# EAGLE board data-boardv6 (EAGLE 6.6.0), part 1 of 2
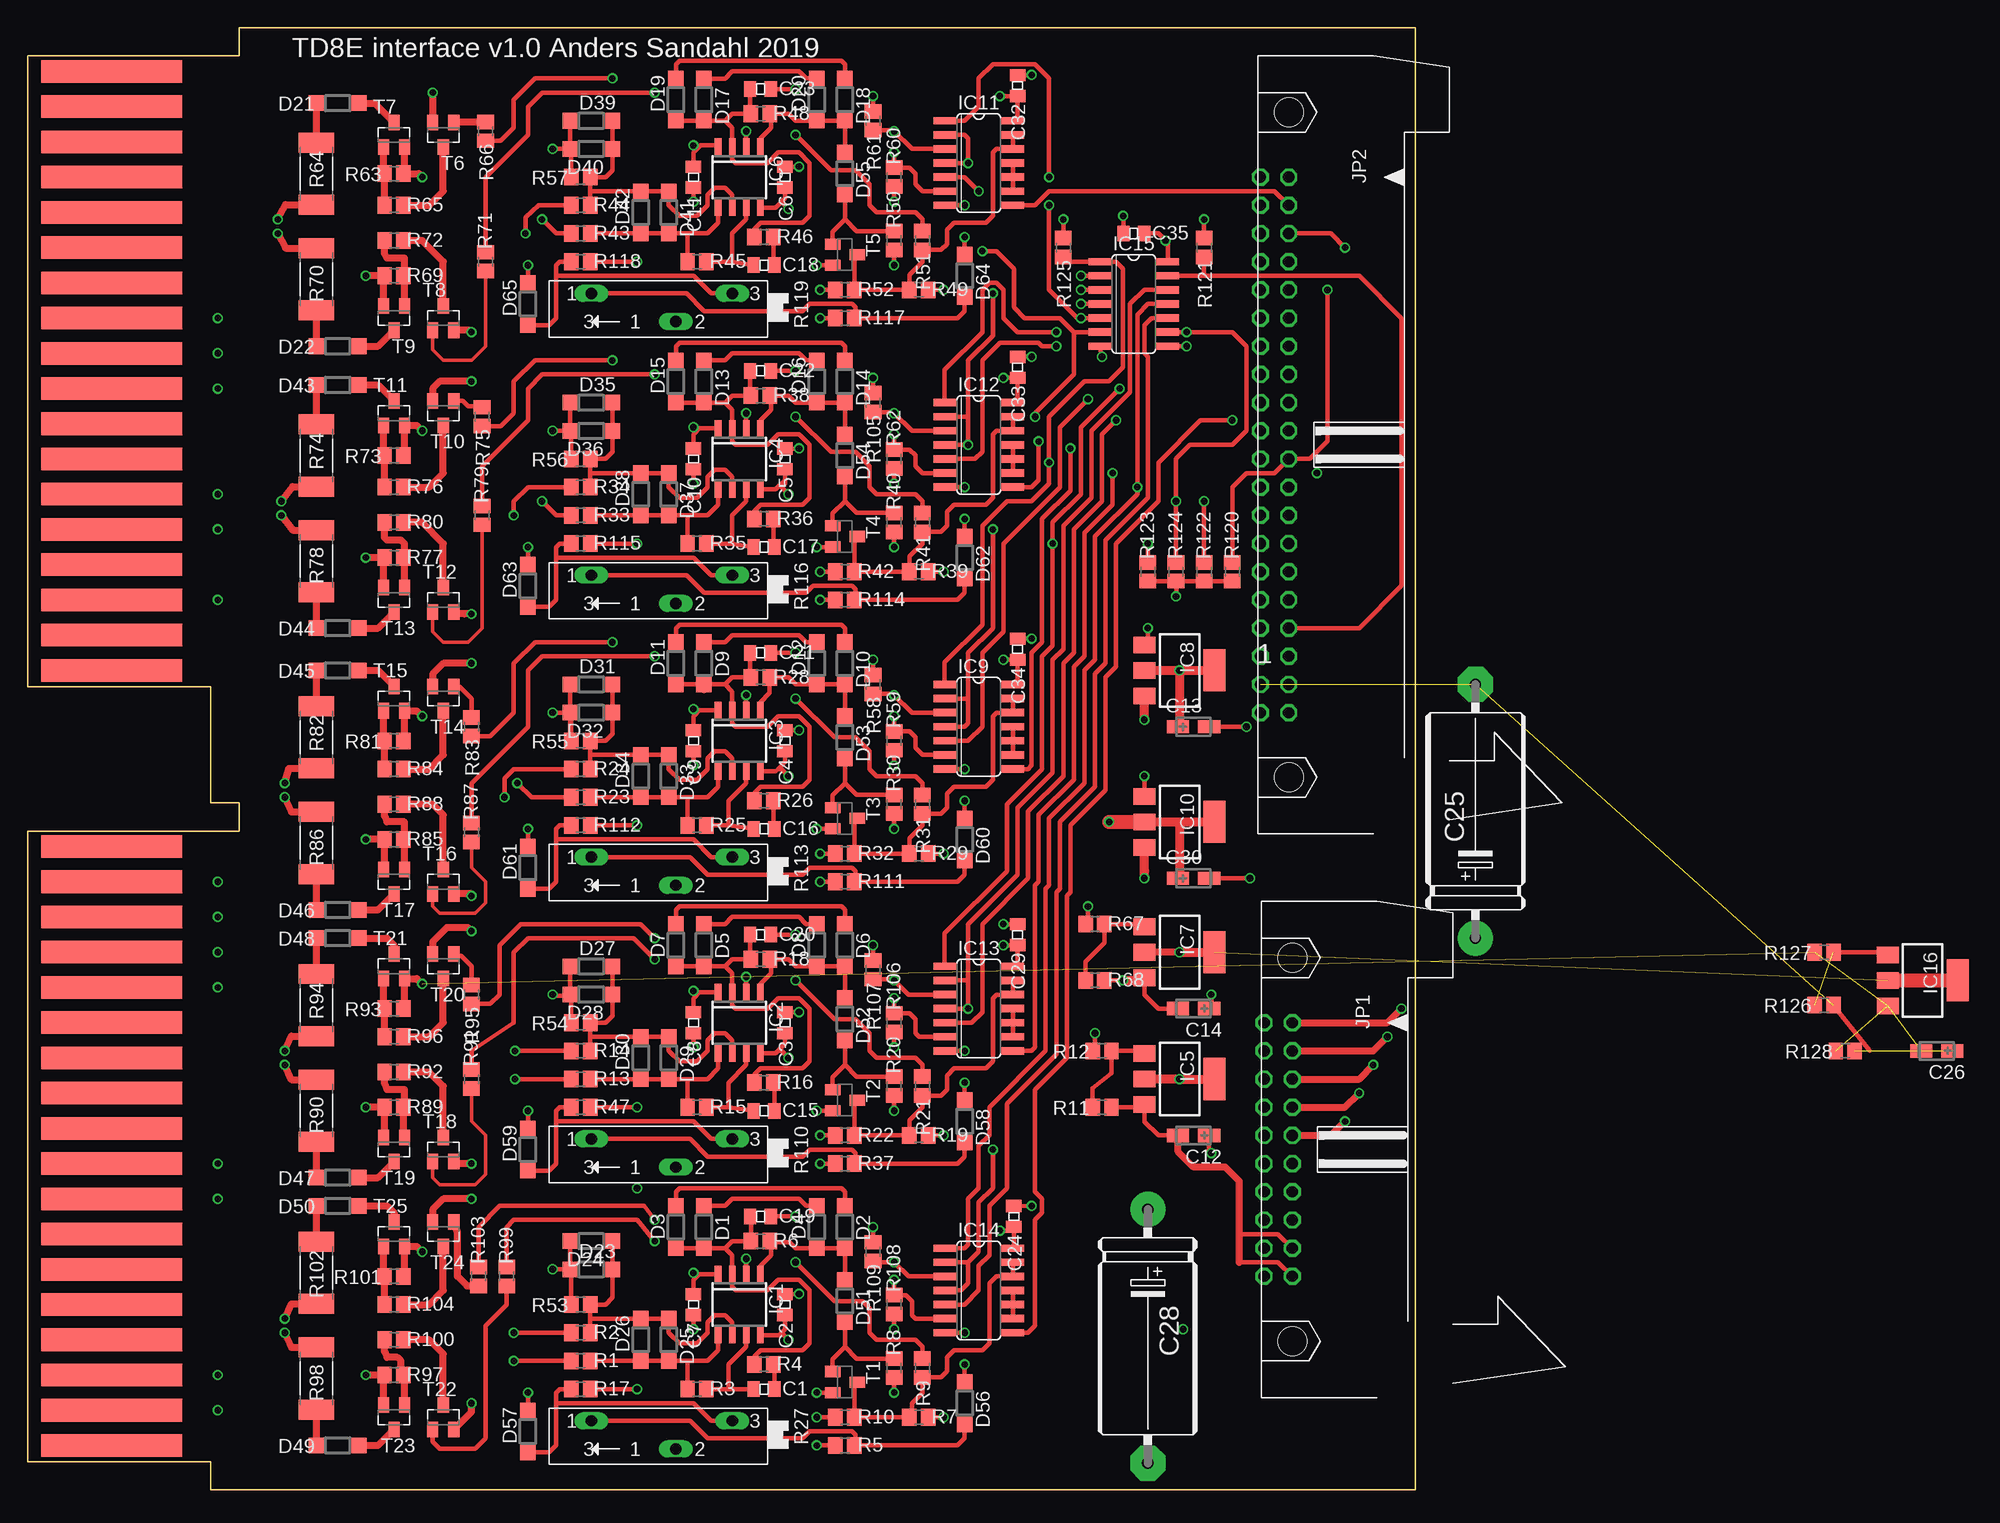
[diagram p0: board, top side]
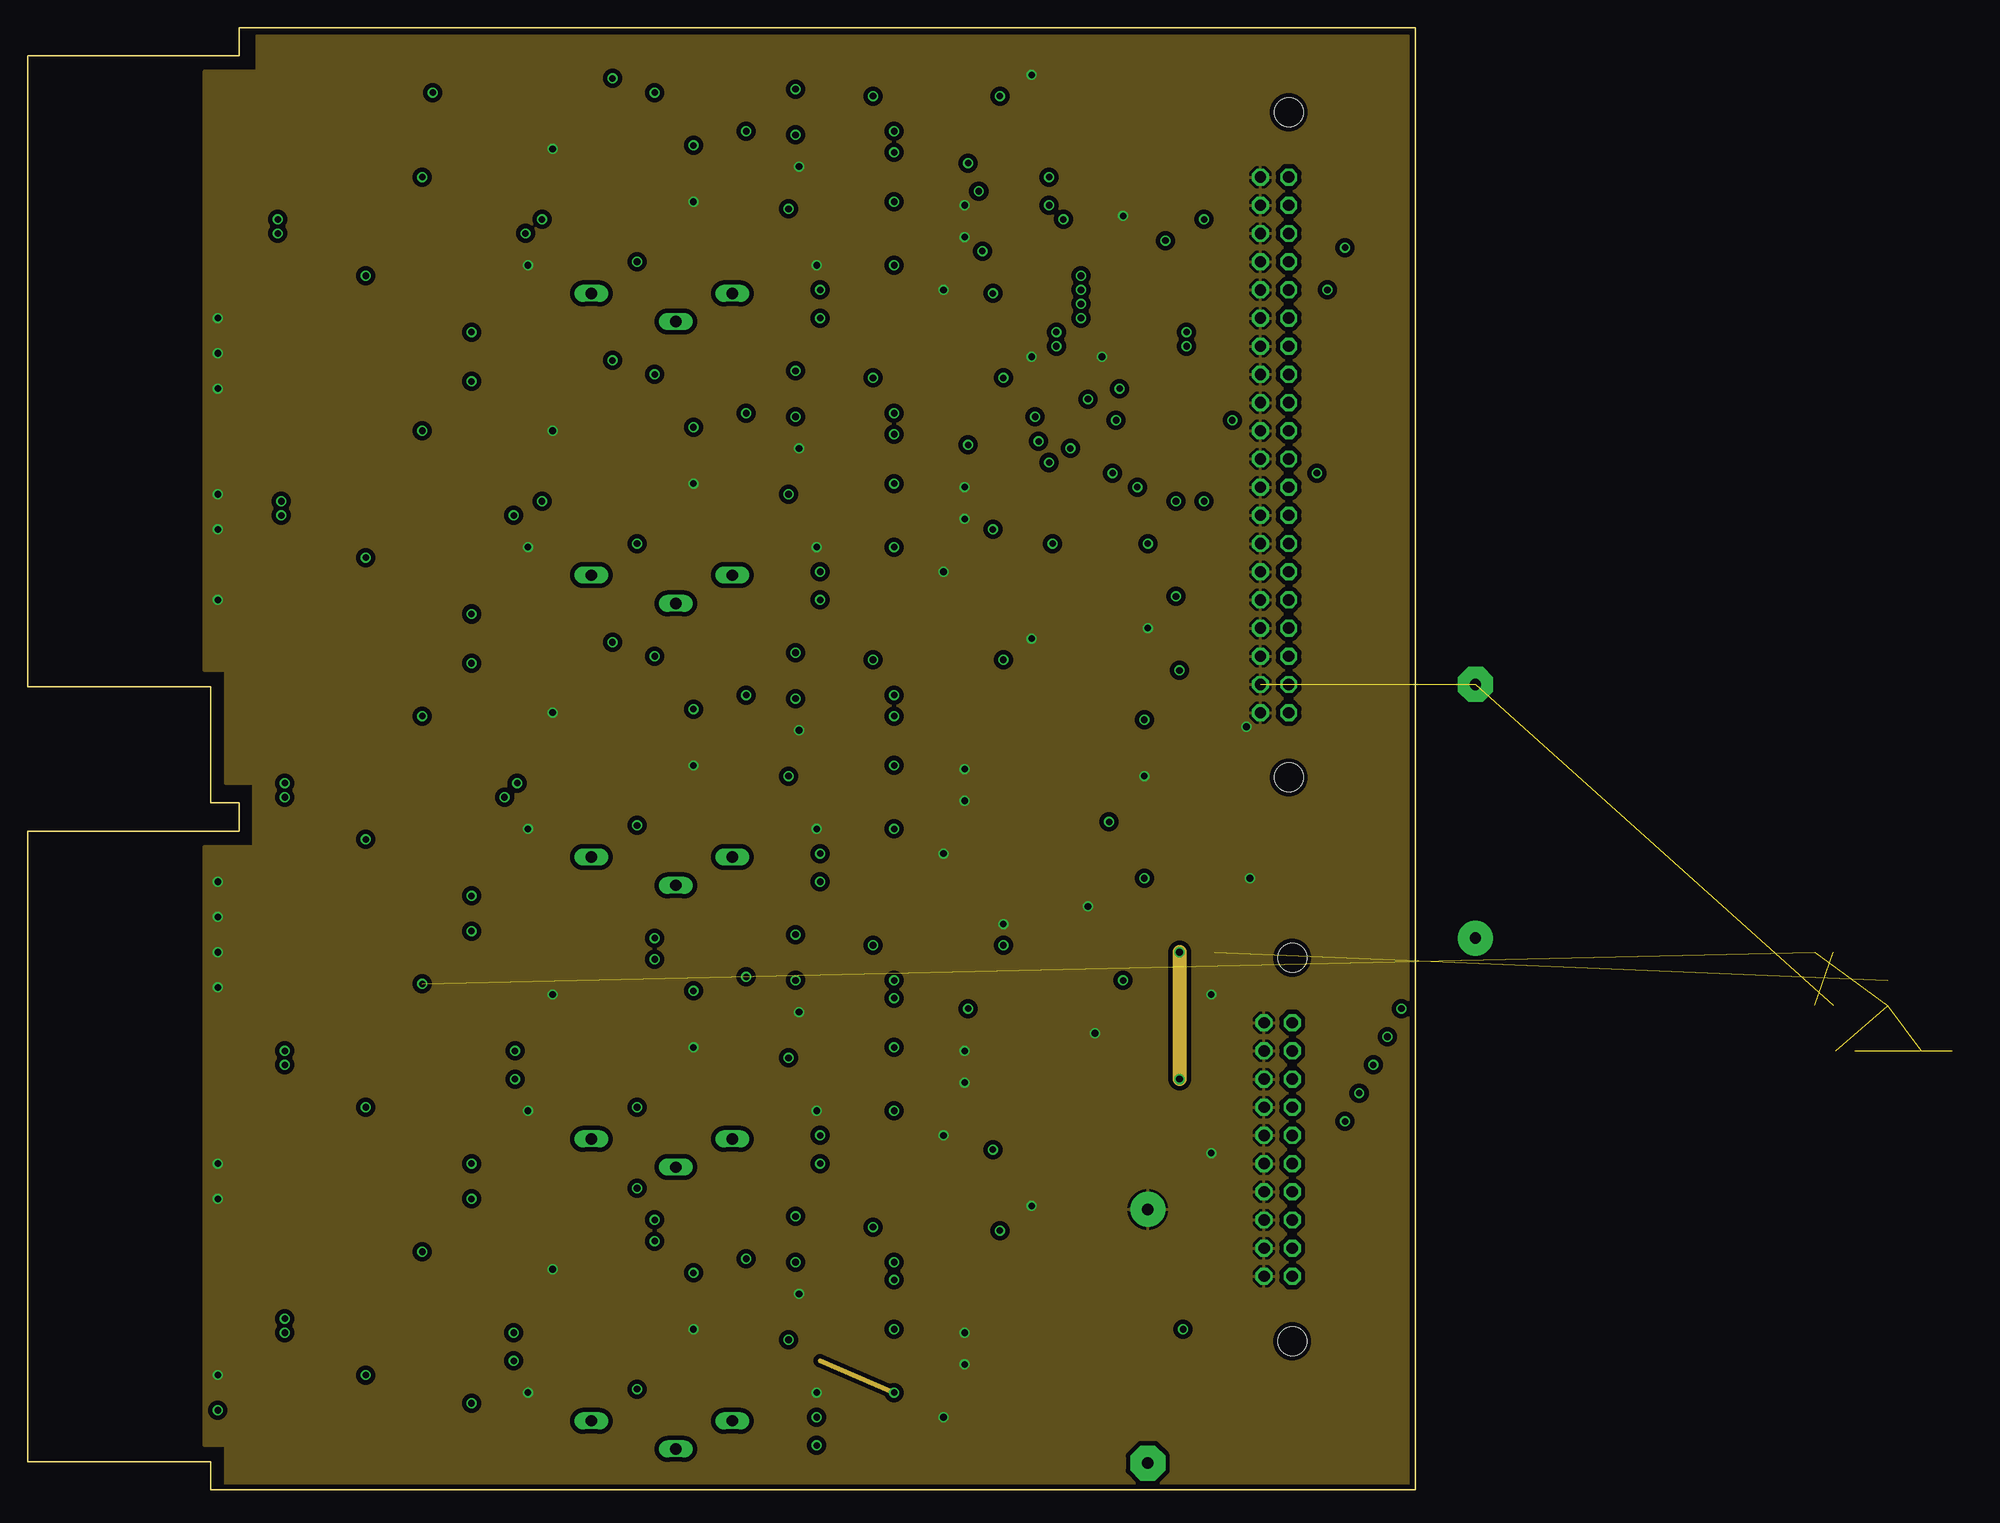
[diagram p1: board, inner layer Route2]
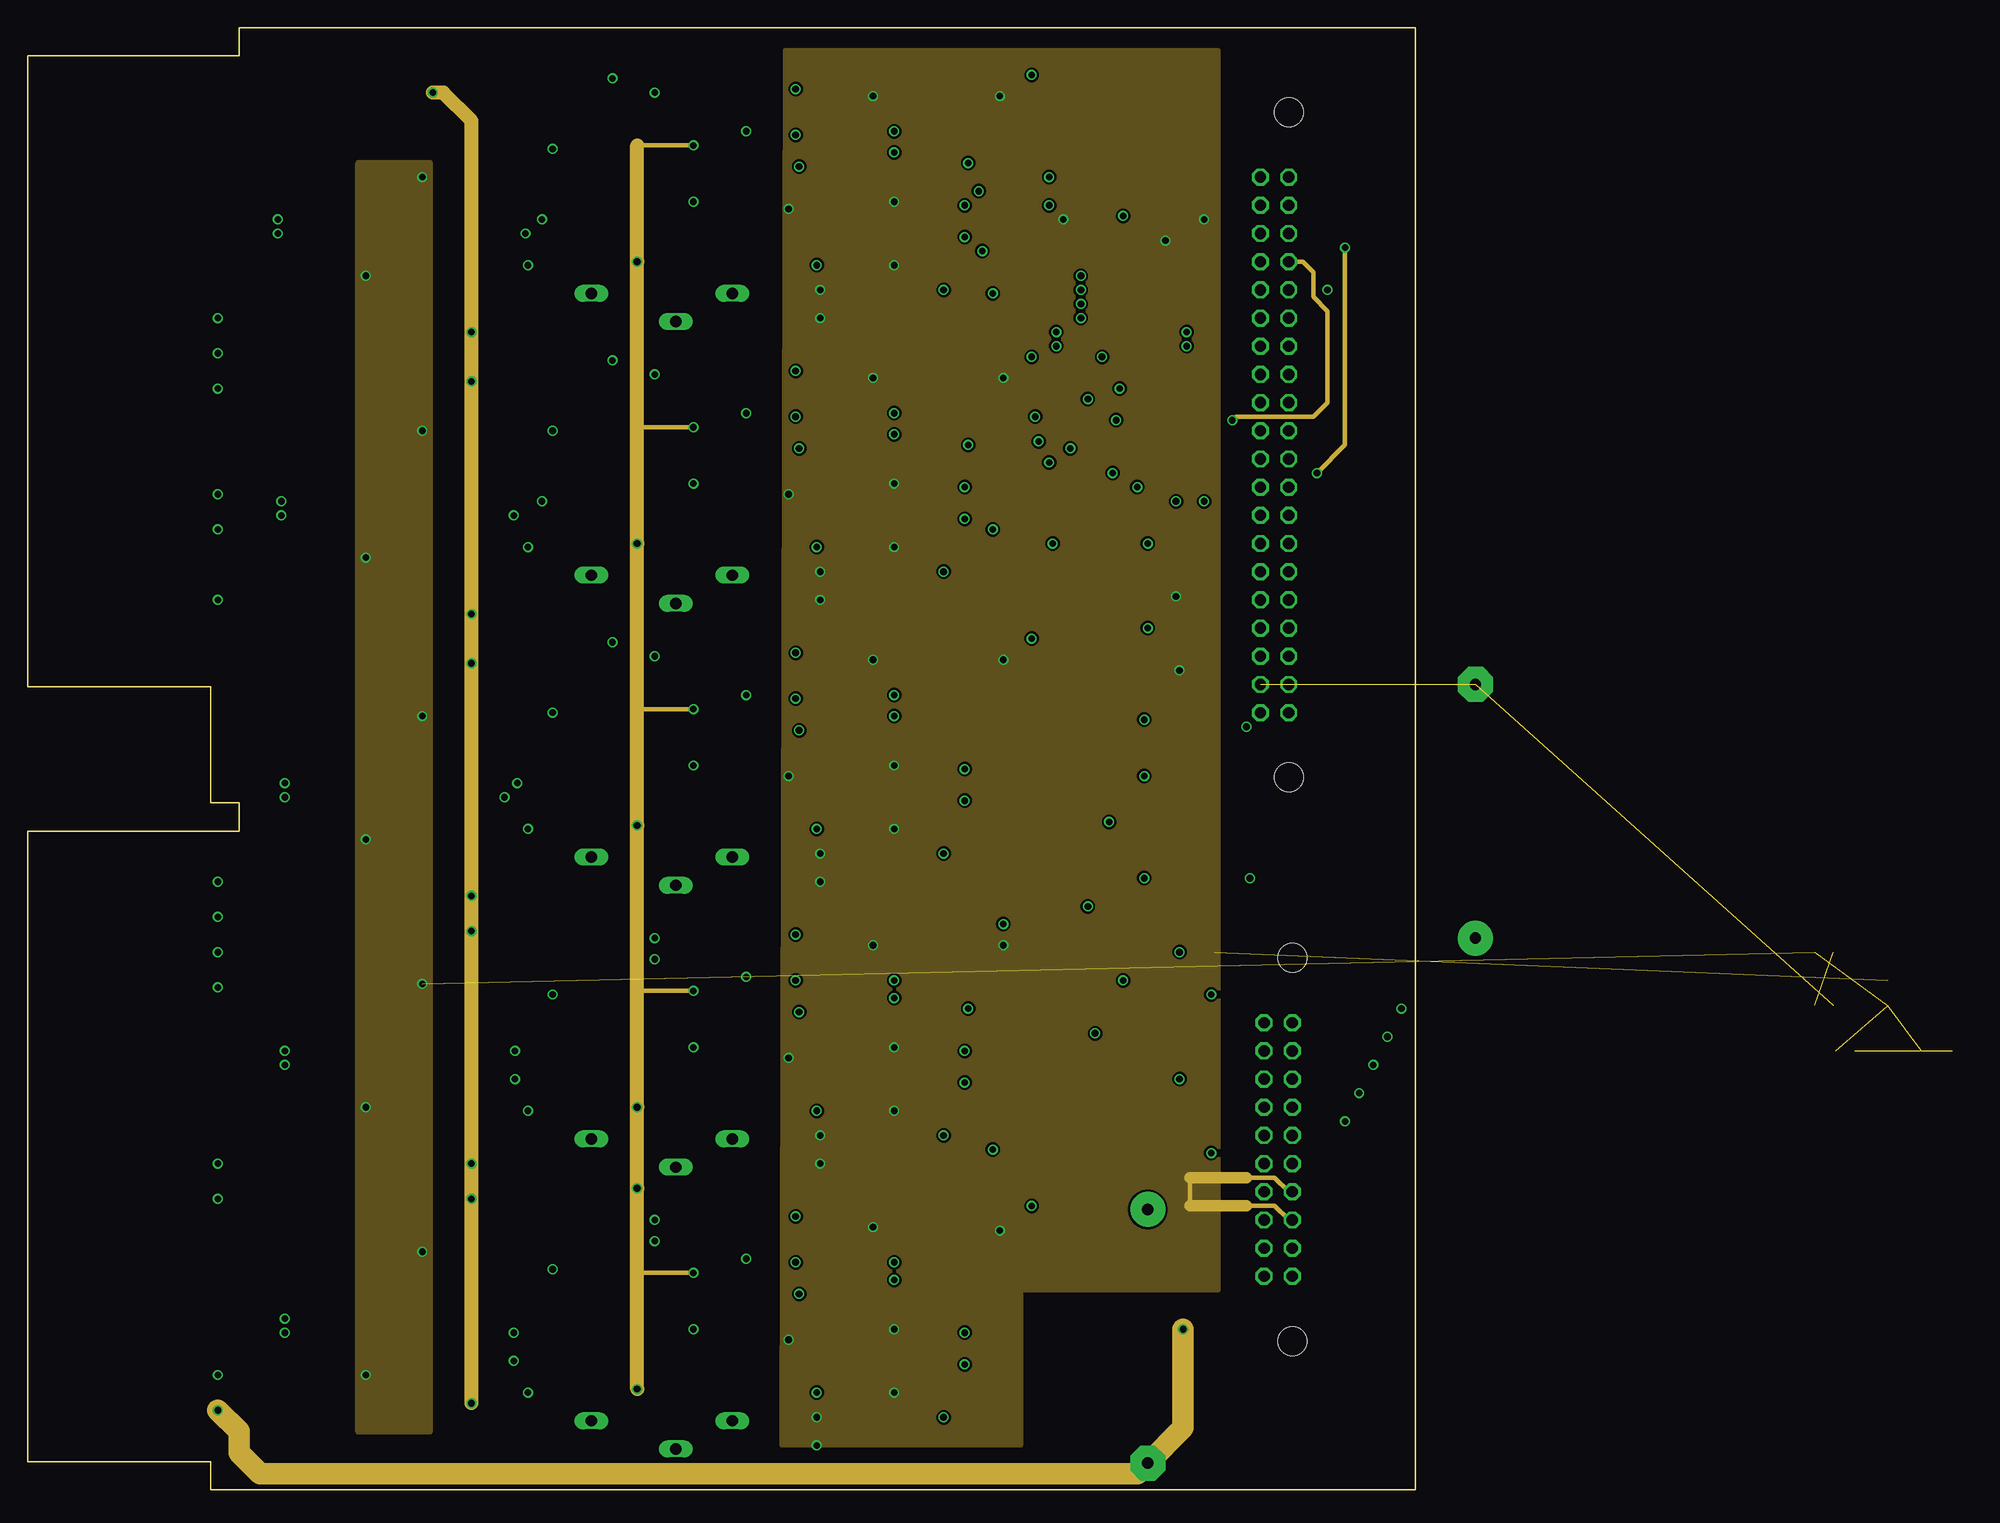
[diagram p2: board, inner layer Route15]
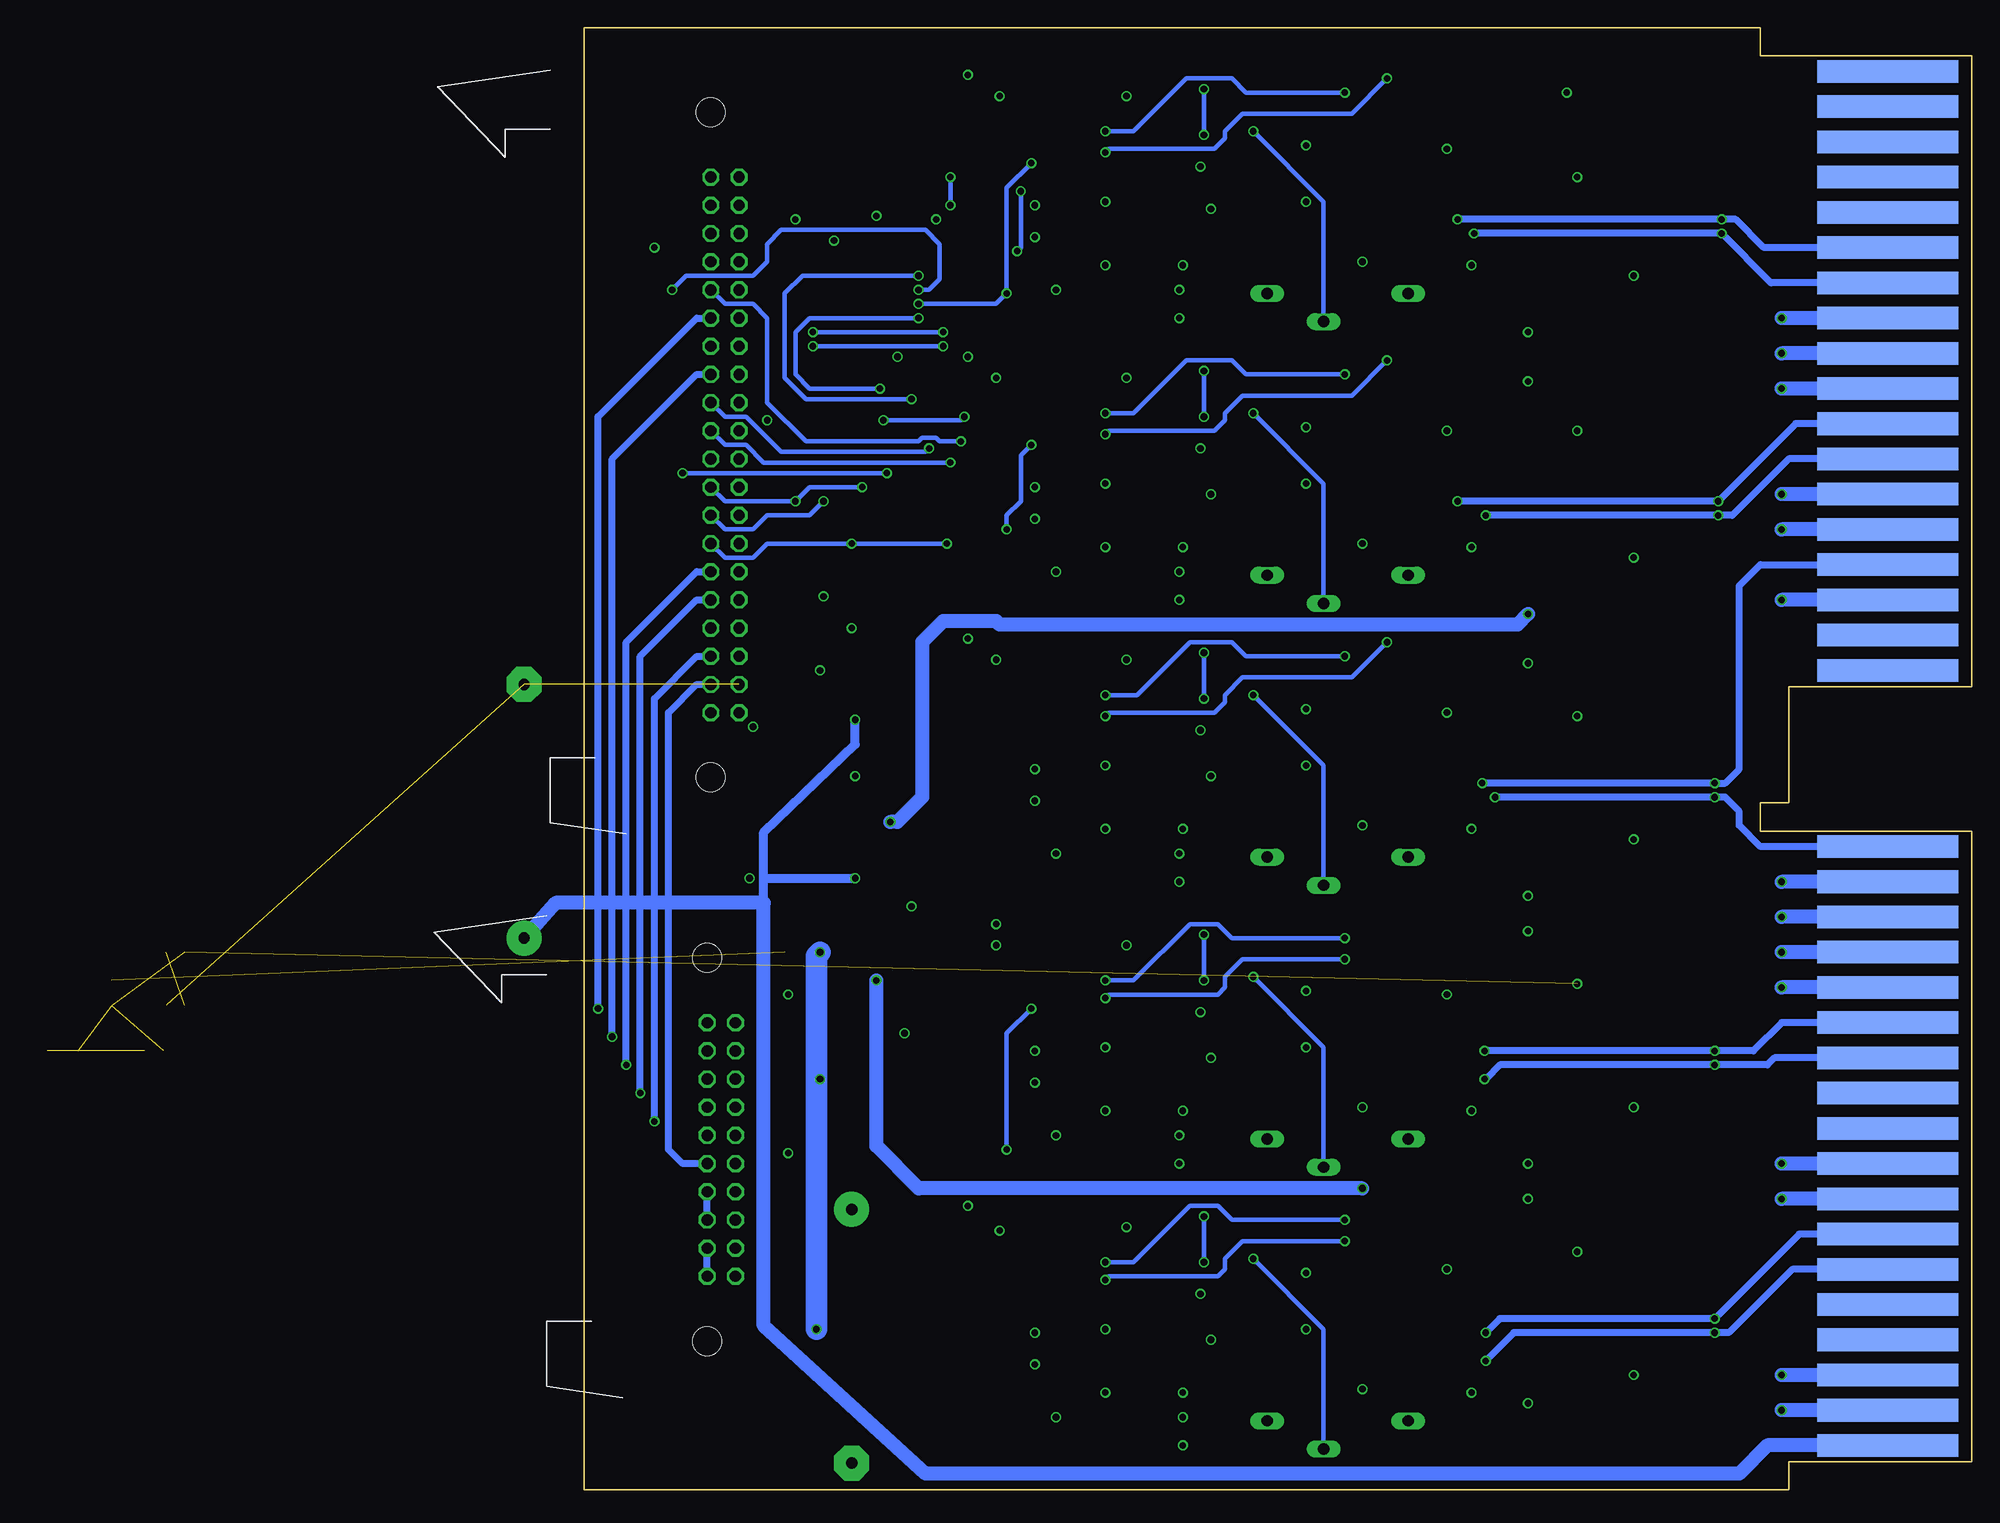
[diagram p3: board, bottom side, seen from below]

Size 125.09 x 131.76 mm. Coordinates in mm from the lower left corner, seen from the top.
Copper layers (1*2*15*16): Top 0.035mm / dielectric 0.2mm / Route2 0.0175mm / dielectric 0.3mm / Route15 0.0175mm / dielectric 0.2mm / Bottom 0.035mm
Design rules "SeeedStudio_4layer_DRU_no_angle_20140221": minimum track width 8mil, minimum drill 12mil, track to track 8mil, track to pad 8mil, pad to pad 8mil, via to via 8mil, smd to smd 0mil, copper to edge 10mil, drill to drill 8mil, minimum pad ring 6mil, minimum via ring 4mil, stop-mask expansion 4mil, vias tented up to drill 100mil, thermal gap 10mil

## Footprints (pad centres in the part's own frame; a part is rotated, then mirrored left to right if it is on the bottom)
0805 = smd 1.092 x 1.397: 1 -0.94,0; 2 0.94,0
CT3216 = smd 2 x 1.2: + -1.4,0; - 1.4,0
E22-9 = drill 1.016 pad 3.15: + -11.43,0 | drill 1.016 pad 3.15 octagon: - 11.43,0
SOD123 = smd 1.4 x 1.4: A 1.9,0; C -1.9,0
SOIC8 = smd 0.6 x 1.5: 1 -1.905,-2.75; 2 -0.635,-2.75; 3 0.635,-2.75; 4 1.905,-2.75; 5 1.905,2.75; 6 0.635,2.75; 7 -0.635,2.75; 8 -1.905,2.75
SOT223@1 = smd 1.5 x 2: 1 -2.3,-3.15; 2 0,-3.15; 3 2.3,-3.15 | smd 3.8 x 2: 4 0,3.15
SOT223@2 = smd 1.5 x 2: 1 -2.3,-3.15; 2 0,-3.15; 3 2.3,-3.15 | smd 3.8 x 2: 4 0,3.15
SOT223@3 = smd 1.5 x 2: 1 -2.3,-3.15; 2 0,-3.15; 3 2.3,-3.15 | smd 3.8 x 2: 4 0,3.15
SO14 = smd 0.66 x 2.032: 1 -3.81,-3.073; 2 -2.54,-3.073; 3 -1.27,-3.073; 4 0,-3.073; 5 1.27,-3.073; 6 2.54,-3.073; 7 3.81,-3.073; 8 3.81,3.073; 9 2.54,3.073; 10 1.27,3.073; 11 0,3.073; 12 -1.27,3.073; 13 -2.54,3.073; 14 -3.81,3.073
SOT223 = smd 1.5 x 2: 1 -2.3,-3.15; 2 0,-3.15; 3 2.3,-3.15 | smd 3.8 x 2: 4 0,3.15
FLIPCHIP-21 = smd 12.7 x 2.032: AA1 6.921,0; AB1 6.921,3.175; AC1 6.921,6.35; AD1 6.921,9.525; AE1 6.921,12.7; AF1 6.921,15.875; AH1 6.921,19.05; AJ1 6.921,22.225; AK1 6.921,25.4; AL1 6.921,28.575; AM1 6.921,31.75; AN1 6.921,34.925; AP1 6.921,38.1; AR1 6.921,41.275; AS1 6.921,44.45; AT1 6.921,47.625; AU1 6.921,50.8; AV1 6.921,53.975; BA1 6.921,69.85; BB1 6.921,73.025; BC1 6.921,76.2; BD1 6.921,79.375; BE1 6.921,82.55; BF1 6.921,85.725; BH1 6.921,88.9; BJ1 6.921,92.075; BK1 6.921,95.25; BL1 6.921,98.425; BM1 6.921,101.6; BN1 6.921,104.775; BP1 6.921,107.95; BR1 6.921,111.125; BS1 6.921,114.3; BT1 6.921,117.475; BU1 6.921,120.65; BV1 6.921,123.825 | smd 12.7 x 2.032 bottom: AA2 6.921,0; AB2 6.921,3.175; AC2 6.921,6.35; AD2 6.921,9.525; AE2 6.921,12.7; AF2 6.921,15.875; AH2 6.921,19.05; AJ2 6.921,22.225; AK2 6.921,25.4; AL2 6.921,28.575; AM2 6.921,31.75; AN2 6.921,34.925; AP2 6.921,38.1; AR2 6.921,41.275; AS2 6.921,44.45; AT2 6.921,47.625; AU2 6.921,50.8; AV2 6.921,53.975; BA2 6.921,69.85; BB2 6.921,73.025; BC2 6.921,76.2; BD2 6.921,79.375; BE2 6.921,82.55; BF2 6.921,85.725; BH2 6.921,88.9; BJ2 6.921,92.075; BK2 6.921,95.25; BL2 6.921,98.425; BM2 6.921,101.6; BN2 6.921,104.775; BP2 6.921,107.95; BR2 6.921,111.125; BS2 6.921,114.3; BT2 6.921,117.475; BU2 6.921,120.65; BV2 6.921,123.825
2Z10/90-FRAMED = drill 1.016 octagon: 1 -11.43,-6.35; 2 -11.43,-3.81; 3 -8.89,-6.35; 4 -8.89,-3.81; 5 -6.35,-6.35; 6 -6.35,-3.81; 7 -3.81,-6.35; 8 -3.81,-3.81; 9 -1.27,-6.35; 10 -1.27,-3.81; 11 1.27,-6.35; 12 1.27,-3.81; 13 3.81,-6.35; 14 3.81,-3.81; 15 6.35,-6.35; 16 6.35,-3.81; 17 8.89,-6.35; 18 8.89,-3.81; 19 11.43,-6.35; 20 11.43,-3.81 | hole 2.6: 17.272,-3.81; -17.272,-3.81
2X20/90-FRAMED = drill 1.016 octagon: 1 -24.13,-6.35; 2 -24.13,-3.81; 3 -21.59,-6.35; 4 -21.59,-3.81; 5 -19.05,-6.35; 6 -19.05,-3.81; 7 -16.51,-6.35; 8 -16.51,-3.81; 9 -13.97,-6.35; 10 -13.97,-3.81; 11 -11.43,-6.35; 12 -11.43,-3.81; 13 -8.89,-6.35; 14 -8.89,-3.81; 15 -6.35,-6.35; 16 -6.35,-3.81; 17 -3.81,-6.35; 18 -3.81,-3.81; 19 -1.27,-6.35; 20 -1.27,-3.81; 21 1.27,-6.35; 22 1.27,-3.81; 23 3.81,-6.35; 24 3.81,-3.81; 25 6.35,-6.35; 26 6.35,-3.81; 27 8.89,-6.35; 28 8.89,-3.81; 29 11.43,-6.35; 30 11.43,-3.81; 31 13.97,-6.35; 32 13.97,-3.81; 33 16.51,-6.35; 34 16.51,-3.81; 35 19.05,-6.35; 36 19.05,-3.81; 37 21.59,-6.35; 38 21.59,-3.81; 39 24.13,-6.35; 40 24.13,-3.81 | hole 2.6: 29.972,-3.81; -29.972,-3.81
R0805 = smd 1.3 x 1.5: 1 -0.85,0; 2 0.85,0
SP19L = drill 1.016 long: A 5.715,-1.27; E -6.985,-1.27; S -1.905,1.27
R2512 = smd 1.8 x 3.2: 1 -2.8,0; 2 2.8,0
SOT23 = smd 1 x 1.4: 1 -0.95,-1.1; 2 0.95,-1.1; 3 0,1.1

## Placement (x,y rotation side)
C1  10n  [0805]  66.36,9.08 0 top
C2  100n  [0805]  68.26,16.7 270 top
C3  100n  [0805]  68.26,42.1 270 top
C4  100n  [0805]  68.26,67.5 270 top
C5  100n  [0805]  68.26,92.9 270 top
C6  100n  [0805]  68.26,118.3 270 top
C7  100n  [0805]  60.01,16.7 270 top
C8  100n  [0805]  60.01,42.1 270 top
C9  100n  [0805]  60.01,67.5 270 top
C10  100n  [0805]  60.01,92.9 270 top
C11  100n  [0805]  60.01,118.3 270 top
C12  10u/10V  [CT3216]  105.09,31.94 180 top
C13  10u/10V  [CT3216]  105.09,68.77 0 top
C14  10u/10V  [CT3216]  105.09,43.37 180 top
C15  10n  [0805]  66.36,34.16 0 top
C16  10n  [0805]  66.36,59.56 0 top
C17  10n  [0805]  66.36,84.96 0 top
C18  10n  [0805]  66.36,110.36 0 top
C19  10p  [0805]  66.04,24.64 0 top
C20  10p  [0805]  66.04,50.04 0 top
C21  10p  [0805]  66.04,75.44 0 top
C22  10p  [0805]  66.04,100.84 0 top
C23  10p  [0805]  66.04,126.24 0 top
C24  100n  [0805]  88.9,24.64 270 top
C25  330u  [E22-9]  130.49,61.15 90 top  (outside the outline)
C26  10u/10V  [CT3216]  172.09,39.56 180 top  (outside the outline)
C28  330u  [E22-9]  100.96,13.84 270 top
C29  100n  [0805]  89.22,50.04 270 top
C30  10u/10V  [CT3216]  105.09,55.12 0 top
C32  100n  [0805]  89.22,126.56 270 top
C33  100n  [0805]  89.22,101.16 270 top
C34  100n  [0805]  89.22,75.76 270 top
C35  100n  [0805]  99.69,113.22 0 top
D1  1N4148  [SOD123]  60.96,23.69 270 top
D2  1N4148  [SOD123]  73.66,23.69 270 top
D3  1N4148  [SOD123]  58.42,23.69 90 top
D4  1N4148  [SOD123]  71.12,23.69 90 top
D5  1N4148  [SOD123]  60.96,49.09 270 top
D6  1N4148  [SOD123]  73.66,49.09 270 top
D7  1N4148  [SOD123]  58.42,49.09 90 top
D8  1N4148  [SOD123]  71.12,49.09 90 top
D9  1N4148  [SOD123]  60.96,74.49 270 top
D10  1N4148  [SOD123]  73.66,74.49 270 top
D11  1N4148  [SOD123]  58.42,74.49 90 top
D12  1N4148  [SOD123]  71.12,74.49 90 top
D13  1N4148  [SOD123]  60.96,99.89 270 top
D14  1N4148  [SOD123]  73.66,99.89 270 top
D15  1N4148  [SOD123]  58.42,99.89 90 top
D16  1N4148  [SOD123]  71.12,99.89 90 top
D17  1N4148  [SOD123]  60.96,125.29 270 top
D18  1N4148  [SOD123]  73.66,125.29 270 top
D19  1N4148  [SOD123]  58.42,125.29 90 top
D20  1N4148  [SOD123]  71.12,125.29 90 top
D21  MBR0540T1  [SOD123]  27.94,124.97 180 top
D22  MBR0540T1  [SOD123]  27.94,103.06 180 top
D23  1N4148  [SOD123]  50.8,19.88 0 top
D24  1N4148  [SOD123]  50.8,22.42 180 top
D25  1N4148  [SOD123]  57.79,13.53 270 top
D26  1N4148  [SOD123]  55.25,13.53 90 top
D27  1N4148  [SOD123]  50.8,47.18 0 top
D28  1N4148  [SOD123]  50.8,44.64 180 top
D29  1N4148  [SOD123]  57.79,38.93 270 top
D30  1N4148  [SOD123]  55.25,38.93 90 top
D31  1N4148  [SOD123]  50.8,72.58 0 top
D32  1N4148  [SOD123]  50.8,70.04 180 top
D33  1N4148  [SOD123]  57.79,64.33 270 top
D34  1N4148  [SOD123]  55.25,64.33 90 top
D35  1N4148  [SOD123]  50.8,97.98 0 top
D36  1N4148  [SOD123]  50.8,95.44 180 top
D37  1N4148  [SOD123]  57.79,89.73 270 top
D38  1N4148  [SOD123]  55.25,89.73 90 top
D39  1N4148  [SOD123]  50.8,123.38 0 top
D40  1N4148  [SOD123]  50.8,120.84 180 top
D41  1N4148  [SOD123]  57.79,115.13 270 top
D42  1N4148  [SOD123]  55.25,115.13 90 top
D43  MBR0540T1  [SOD123]  27.94,99.57 180 top
D44  MBR0540T1  [SOD123]  27.94,77.66 180 top
D45  MBR0540T1  [SOD123]  27.94,73.85 180 top
D46  MBR0540T1  [SOD123]  27.94,52.26 180 top
D47  MBR0540T1  [SOD123]  27.94,28.13 180 top
D48  MBR0540T1  [SOD123]  27.94,49.72 180 top
D49  MBR0540T1  [SOD123]  27.94,4 180 top
D50  MBR0540T1  [SOD123]  27.94,25.59 180 top
D51  1N4148  [SOD123]  73.66,17.02 270 top
D52  1N4148  [SOD123]  73.66,42.42 270 top
D53  1N4148  [SOD123]  73.66,67.82 270 top
D54  1N4148  [SOD123]  73.66,93.22 270 top
D55  1N4148  [SOD123]  73.66,118.62 270 top
D56  1N4148  [SOD123]  84.45,7.81 270 top
D57  1N4148  [SOD123]  45.09,5.27 90 top
D58  1N4148  [SOD123]  84.45,33.21 270 top
D59  1N4148  [SOD123]  45.09,30.67 90 top
D60  1N4148  [SOD123]  84.45,58.61 270 top
D61  1N4148  [SOD123]  45.09,56.07 90 top
D62  1N4148  [SOD123]  84.45,84.01 270 top
D63  1N4148  [SOD123]  45.09,81.47 90 top
D64  1N4148  [SOD123]  84.45,109.41 270 top
D65  1N4148  [SOD123]  45.09,106.87 90 top
IC1  OPA2134D  [SOIC8]  64.13,16.7 180 top
IC2  OPA2134D  [SOIC8]  64.13,42.1 180 top
IC3  OPA2134D  [SOIC8]  64.13,67.5 180 top
IC4  OPA2134D  [SOIC8]  64.13,92.9 180 top
IC5  LM337  [SOT223@1]  103.82,37.02 270 top
IC6  OPA2134D  [SOIC8]  64.13,118.3 180 top
IC7  LM337  [SOT223@2]  103.82,48.45 270 top
IC8  LM1117-5  [SOT223@3]  103.82,73.85 270 top
IC9  7400D  [SO14]  85.72,68.77 270 top
IC10  LM1117-3.3  [SOT223@3]  103.82,60.2 270 top
IC11  7400D  [SO14]  85.72,119.57 270 top
IC12  7400D  [SO14]  85.72,94.17 270 top
IC13  7400D  [SO14]  85.72,43.37 270 top
IC14  7400D  [SO14]  85.72,17.97 270 top
IC15  7404D  [SO14]  99.69,106.87 270 top
IC16  LM337  [SOT223]  170.81,45.91 270 top  (outside the outline)
J1  FLIPCHIP_2  [FLIPCHIP-21]  0.64,4 0 top
JP1  [2Z10/90-FRAMED]  117.79,30.67 270 top
JP2  [2X20/90-FRAMED]  117.47,94.17 270 top
R1  220  [R0805]  49.85,11.62 0 top
R2  220  [R0805]  49.85,14.16 0 top
R3  22k  [R0805]  60.33,9.08 0 top
R4  4k7  [R0805]  66.36,11.3 0 top
R5  2k2  [R0805]  73.66,4 0 top
R6  470k  [R0805]  66.04,22.42 0 top
R7  3k  [R0805]  80.33,6.54 0 top
R8  4k7  [R0805]  78.1,10.99 90 top
R9  470k  [R0805]  80.64,10.99 270 top
R10  1k  [R0805]  73.66,6.54 0 top
R11  240  [R0805]  96.84,34.48 180 top
R12  330  [R0805]  96.84,39.56 180 top
R13  220  [R0805]  49.85,37.02 0 top
R14  220  [R0805]  49.85,39.56 0 top
R15  22k  [R0805]  60.33,34.48 0 top
R16  4k7  [R0805]  66.36,36.7 0 top
R17  2k2  [R0805]  49.85,9.08 0 top
R18  470k  [R0805]  66.04,47.82 0 top
R19  3k  [R0805]  80.33,31.94 0 top
R20  4k7  [R0805]  78.1,36.39 90 top
R21  470k  [R0805]  80.64,36.39 270 top
R22  1k  [R0805]  73.66,31.94 0 top
R23  220  [R0805]  49.85,62.42 0 top
R24  220  [R0805]  49.85,64.96 0 top
R25  22k  [R0805]  60.33,59.88 0 top
R26  4k7  [R0805]  66.36,62.1 0 top
R27  10k  [SP19L]  56.52,4.95 180 top
R28  470k  [R0805]  66.04,73.22 0 top
R29  3k  [R0805]  80.33,57.34 0 top
R30  4k7  [R0805]  78.1,61.79 90 top
R31  470k  [R0805]  80.64,61.79 270 top
R32  1k  [R0805]  73.66,57.34 0 top
R33  220  [R0805]  49.85,87.82 0 top
R34  220  [R0805]  49.85,90.36 0 top
R35  22k  [R0805]  60.33,85.28 0 top
R36  4k7  [R0805]  66.36,87.5 0 top
R37  2k2  [R0805]  73.66,29.4 0 top
R38  470k  [R0805]  66.04,98.62 0 top
R39  3k  [R0805]  80.33,82.74 0 top
R40  4k7  [R0805]  78.1,87.19 90 top
R41  470k  [R0805]  80.64,87.19 270 top
R42  1k  [R0805]  73.66,82.74 0 top
R43  220  [R0805]  49.85,113.22 0 top
R44  220  [R0805]  49.85,115.76 0 top
R45  22k  [R0805]  60.33,110.68 0 top
R46  4k7  [R0805]  66.36,112.9 0 top
R47  2k2  [R0805]  49.85,34.48 0 top
R48  470k  [R0805]  66.04,124.02 0 top
R49  3k  [R0805]  80.33,108.14 0 top
R50  4k7  [R0805]  78.1,112.59 90 top
R51  470k  [R0805]  80.64,112.59 270 top
R52  1k  [R0805]  73.66,108.14 0 top
R53  22k  [R0805]  49.85,16.7 180 top
R54  22k  [R0805]  49.85,42.1 180 top
R55  22k  [R0805]  49.85,67.5 180 top
R56  22k  [R0805]  49.85,92.9 180 top
R57  22k  [R0805]  49.85,118.3 180 top
R58  1k  [R0805]  76.2,72.58 270 top
R59  1k  [R0805]  78.1,67.5 90 top
R60  1k  [R0805]  78.1,118.3 90 top
R61  1k  [R0805]  76.2,123.38 270 top
R62  1k  [R0805]  78.1,92.9 90 top
R63  150  [R0805]  33.02,118.62 180 top
R64  75 2W  [R2512]  26.04,118.62 270 top
R65  680  [R0805]  33.02,115.76 0 top
R66  6k8  [R0805]  41.27,122.43 270 top
R67  720  [R0805]  96.2,50.99 0 top
R68  240  [R0805]  96.2,45.91 0 top
R69  150  [R0805]  33.02,109.41 0 top
R70  75 2W  [R2512]  26.04,109.09 90 top
R71  6k8  [R0805]  41.27,110.68 90 top
R72  680  [R0805]  33.02,112.59 0 top
R73  150  [R0805]  33.02,93.22 180 top
R74  75 2W  [R2512]  26.04,93.22 270 top
R75  6k8  [R0805]  40.96,96.71 270 top
R76  680  [R0805]  33.02,90.36 0 top
R77  150  [R0805]  33.02,84.01 0 top
R78  75 2W  [R2512]  26.04,83.69 90 top
R79  6k8  [R0805]  40.96,87.82 90 top
R80  680  [R0805]  33.02,87.19 0 top
R81  150  [R0805]  33.02,67.5 180 top
R82  75 2W  [R2512]  26.04,67.82 270 top
R83  6k8  [R0805]  40.01,68.77 270 top
R84  680  [R0805]  33.02,64.96 0 top
R85  150  [R0805]  33.02,58.61 0 top
R86  75 2W  [R2512]  26.04,58.29 90 top
R87  6k8  [R0805]  40.01,59.25 90 top
R88  680  [R0805]  33.02,61.79 0 top
R89  150  [R0805]  33.02,34.48 0 top
R90  75 2W  [R2512]  26.04,34.16 90 top
R91  6k8  [R0805]  40.01,37.02 90 top
R92  680  [R0805]  33.02,37.66 0 top
R93  150  [R0805]  33.02,43.37 180 top
R94  75 2W  [R2512]  26.04,43.69 270 top
R95  6k8  [R0805]  40.01,44.64 270 top
R96  680  [R0805]  33.02,40.83 0 top
R97  150  [R0805]  33.02,10.35 0 top
R98  75 2W  [R2512]  26.04,10.03 90 top
R99  6k8  [R0805]  43.18,19.24 90 top
R100  680  [R0805]  33.02,13.53 0 top
R101  150  [R0805]  33.02,19.24 180 top
R102  75 2W  [R2512]  26.04,19.56 270 top
R103  6k8  [R0805]  40.64,19.24 90 top
R104  680  [R0805]  33.02,16.7 0 top
R105  1k  [R0805]  76.2,97.98 270 top
R106  1k  [R0805]  78.1,42.1 90 top
R107  1k  [R0805]  76.2,46.86 270 top
R108  1k  [R0805]  78.1,16.7 90 top
R109  1k  [R0805]  76.2,21.46 270 top
R110  10k  [SP19L]  56.52,30.35 180 top
R111  2k2  [R0805]  73.66,54.8 0 top
R112  2k2  [R0805]  49.85,59.88 0 top
R113  10k  [SP19L]  56.52,55.75 180 top
R114  2k2  [R0805]  73.66,80.2 0 top
R115  2k2  [R0805]  49.85,85.28 0 top
R116  10k  [SP19L]  56.52,81.15 180 top
R117  2k2  [R0805]  73.66,105.6 0 top
R118  2k2  [R0805]  49.85,110.68 0 top
R119  10k  [SP19L]  56.52,106.55 180 top
R120  470  [R0805]  108.58,82.74 90 top
R121  470  [R0805]  106.05,111.95 270 top
R122  470  [R0805]  106.05,82.74 90 top
R123  470  [R0805]  100.96,82.74 90 top
R124  470  [R0805]  103.5,82.74 90 top
R125  470  [R0805]  93.34,111.95 270 top
R126  2k05  [R0805]  161.93,43.69 180 top  (outside the outline)
R127  240  [R0805]  161.93,48.45 180 top  (outside the outline)
R128  1k8  [R0805]  163.83,39.56 180 top  (outside the outline)
T1  BC847  [SOT23]  73.66,9.72 270 top
T2  BC847  [SOT23]  73.66,35.12 270 top
T3  BC847  [SOT23]  73.66,60.52 270 top
T4  BC847  [SOT23]  73.66,85.92 270 top
T5  BC847  [SOT23]  73.66,111.32 270 top
T6  BC857B  [SOT23]  37.47,122.11 180 top
T7  IRLML0100TR  [SOT23]  33.02,122.11 0 top
T8  BC857B  [SOT23]  37.47,105.6 0 top
T9  IRLML0100TR  [SOT23]  33.02,105.6 180 top
T10  BC857B  [SOT23]  37.47,97.03 180 top
T11  IRLML0100TR  [SOT23]  33.02,97.03 0 top
T12  BC857B  [SOT23]  37.47,80.2 0 top
T13  IRLML0100TR  [SOT23]  33.02,80.2 180 top
T14  BC857B  [SOT23]  37.47,71.31 180 top
T15  IRLML0100TR  [SOT23]  33.02,71.31 0 top
T16  BC857B  [SOT23]  37.47,54.8 0 top
T17  IRLML0100TR  [SOT23]  33.02,54.8 180 top
T18  BC857B  [SOT23]  37.47,30.67 0 top
T19  IRLML0100TR  [SOT23]  33.02,30.67 180 top
T20  BC857B  [SOT23]  37.47,47.18 180 top
T21  IRLML0100TR  [SOT23]  33.02,47.18 0 top
T22  BC857B  [SOT23]  37.47,6.54 0 top
T23  IRLML0100TR  [SOT23]  33.02,6.54 180 top
T24  BC857B  [SOT23]  37.47,23.05 180 top
T25  IRLML0100TR  [SOT23]  33.02,23.05 0 top

## Library data of the parts
C1-C11 C15-C24 C29 C32-C35 = capsmd
C12-C14 C25 C26 C28 C30 D21 D22 D43-D50 J1 R1-R128 T6-T25 = anders
D1-D20 D23-D42 D51-D65 = diode
IC1-IC4 IC6 = linear
IC5 IC7 IC8 IC10 IC16 = v-reg
IC9 IC11-IC15 = 74xx-eu
JP1 JP2 = pinhead
T1-T5 = transistor

## Nets
+3.3V: C30.+ IC10.2 IC10.4 T6.2 T8.2 T10.2 T12.2 T14.2 T16.2 T18.2 T20.2 T22.2 T24.2
+10V: C25.+ IC8.3 IC10.3 J1.AA2
-3V: C12.- IC5.3 JP1.18 JP1.20 R11.1
-12V: C26.- IC16.3 R63.1 R69.1 R73.1 R77.1 R81.1 R85.1 R89.1 R93.1 R97.1 R101.1 R127.2 R128.2 T7.2 T9.2 T11.2 T13.2 T15.2 T17.2 T19.2 T21.2 T23.2 T25.2
-15V: C28.- IC5.2 IC5.4 IC7.2 IC7.4 IC16.2 IC16.4 J1.AB2
CON_ALL_HALT_L: JP1.10 JP2.36
D0(0): J1.BP2 R43.1 R64.2
D0(1): J1.BN2 R44.1 R70.2
D1(0): J1.BJ2 R33.1 R74.2
D1(1): J1.BH2 R34.1 R78.2
D2(0): J1.BD2 R23.1 R82.2
D2(1): J1.AV2 R24.1 R86.2
DATA1: IC11.12 IC11.13 R49.1 R51.2 R52.2 T5.3
DATA2: IC12.12 IC12.13 R39.1 R41.2 R42.2 T4.3
DATA3: IC9.12 IC9.13 R29.1 R31.2 R32.2 T3.3
F/R(0)_H: JP1.12 JP2.38
GND: C2.1 C3.1 C4.1 C5.1 C6.1 C7.2 C8.2 C9.2 C10.2 C11.2 C12.+ C13.- C14.+ C24.1 C25.- C26.+ C28.+ C29.1 C30.- C32.1 C33.1 C34.1 C35.1 D23.C D24.A D27.C D28.A D31.C D32.A D35.C D36.A D39.C D40.A D56.C D57.A D58.C D59.A D60.C D61.A D62.C D63.A D64.C D65.A IC8.1 IC9.7 IC10.1 IC11.7 IC12.7 IC13.7 IC14.7 IC15.7 J1.AC2 J1.AJ2 J1.AK2 J1.AR2 J1.AS2 J1.AT2 J1.AU2 J1.BC2 J1.BE2 J1.BF2 J1.BK2 J1.BL2 J1.BM2 JP1.1 JP1.3 JP1.5 JP1.7 JP1.9 JP1.11 JP1.13 JP1.15 JP1.17 JP1.19 JP2.1 JP2.3 JP2.5 JP2.7 JP2.9 JP2.11 JP2.13 JP2.15 JP2.17 JP2.19 JP2.21 JP2.23 JP2.25 JP2.27 JP2.29 JP2.31 JP2.33 JP2.35 JP2.37 JP2.39 R7.2 R12.2 R19.2 R29.2 R39.2 R49.2 R53.2 R54.2 R55.2 R56.2 R57.2 R67.1 R126.1 R128.1 T1.2 T2.2 T3.2 T4.2 T5.2
MARK: IC13.12 IC13.13 R19.1 R21.2 R22.2 T2.3
MT(0): J1.AN2 R13.1 R90.2
MT(1): J1.AP2 R14.1 R94.2
N$1: D25.A D26.C IC1.5 R1.2 R3.1
N$2: R75.1 T10.1
N$3: C1.1 IC1.7 R3.2
N$4: D1.C D4.A
N$5: C19.1 D1.A D3.C IC1.3 R4.1 R6.1
N$6: D43.A R74.1
N$7: D2.A D4.C D51.C IC1.1 R6.2
N$8: D51.A R8.2 T1.1
N$9: C19.2 R9.1
N$10: C23.2 R51.1
N$11: D2.C D3.A
N$12: C1.2 R4.2
N$13: D43.C T11.3
N$15: R76.2 T10.3
N$17: R73.2 R76.1 T11.1
N$18: R79.1 T12.1
N$20: D44.A R78.1
N$21: D44.C T13.3
N$22: R80.2 T12.3
N$23: R77.2 R80.1 T13.1
N$24: IC5.1 R11.2 R12.1
N$25: IC9.6 R59.2 R83.2
N$26: R83.1 T14.1
N$27: C15.1 IC2.7 R15.2
N$28: D5.C D8.A
N$29: C20.1 D5.A D7.C IC2.3 R16.1 R18.1
N$30: D6.A D8.C D52.C IC2.1 R18.2
N$31: D45.A R82.1
N$32: D52.A R20.2 T2.1
N$33: IC1.2 R27.S
N$34: C22.2 R41.1
N$35: C15.2 R16.2
N$36: D45.C T15.3
N$38: D6.C D7.A
N$39: R84.2 T14.3
N$40: C16.1 IC3.7 R25.2
N$41: D9.C D12.A
N$42: C21.1 D9.A D11.C IC3.3 R26.1 R28.1
N$43: D10.A D12.C D53.C IC3.1 R28.2
N$44: R81.2 R84.1 T15.1
N$45: D53.A R30.2 T3.1
N$47: D56.A R5.2 R27.A
N$48: C16.2 R26.2
N$49: IC11.9 IC11.10 IC11.11
N$50: IC9.9 IC9.10 IC9.11
N$51: D10.C D11.A
N$52: R87.1 T16.1
N$53: C17.1 IC4.7 R35.2
N$54: D13.C D16.A
N$55: C22.1 D13.A D15.C IC4.3 R36.1 R38.1
N$56: D14.A D16.C D54.C IC4.1 R38.2
N$57: D46.A R86.1
N$58: D54.A R40.2 T4.1
N$60: C21.2 R31.1
N$61: C17.2 R36.2
N$62: IC14.5 IC15.10
N$63: IC11.6 R60.2 R66.2
N$64: D14.C D15.A
N$65: D46.C T17.3
N$66: C18.1 IC6.7 R45.2
N$67: D17.C D20.A
N$68: C23.1 D17.A D19.C IC6.3 R46.1 R48.1
N$69: D18.A D20.C D55.C IC6.1 R48.2
N$70: R88.2 T16.3
N$71: D55.A R50.2 T5.1
N$73: D57.C R17.1 R27.E
N$74: C18.2 R46.2
N$75: IC12.6 R62.2 R75.2
N$76: IC13.9 IC13.10 IC13.11
N$77: D18.C D19.A
N$78: IC13.6 R91.2 R106.2
N$79: IC12.9 IC12.10 IC12.11
N$80: IC13.3 R95.2 R107.2
N$81: IC14.6 R99.2 R108.2
N$83: IC14.3 R103.2 R109.2
N$84: C20.2 R21.1
N$85: IC2.2 R110.S
N$86: D58.A R37.2 R110.A
N$87: D59.C R47.1 R110.E
N$88: D60.A R111.2 R113.A
N$89: D61.C R112.1 R113.E
N$90: D62.A R114.2 R116.A
N$91: D63.C R115.1 R116.E
N$92: D64.A R117.2 R119.A
N$93: D65.C R118.1 R119.E
N$94: R65.2 T6.3
N$95: R63.2 R65.1 T7.1
N$96: IC7.1 R67.2 R68.1
N$97: R71.1 T8.1
N$98: IC4.2 R116.S
N$99: R66.1 T6.1
N$100: D22.A R70.1
N$101: R85.2 R88.1 T17.1
N$102: D21.A R64.1
N$103: D21.C T7.3
N$104: R91.1 T18.1
N$105: D47.A R90.1
N$106: IC3.2 R113.S
N$107: D47.C T19.3
N$108: R92.2 T18.3
N$109: R89.2 R92.1 T19.1
N$110: R95.1 T20.1
N$111: D48.A R94.1
N$112: D48.C T21.3
N$113: R96.2 T20.3
N$114: R93.2 R96.1 T21.1
N$115: IC6.2 R119.S
N$116: IC14.9 IC14.10 IC14.11
N$117: IC12.5 IC15.8
N$118: IC9.5 IC15.2
N$119: IC16.1 R126.2 R127.1
N$125: D22.C T9.3
N$126: R72.2 T8.3
N$127: R69.2 R72.1 T9.1
N$128: D23.A D24.C D25.C D26.A IC1.6 R2.2 R53.1
N$129: D29.A D30.C IC2.5 R13.2 R15.1
N$130: D27.A D28.C D29.C D30.A IC2.6 R14.2 R54.1
N$131: R99.1 T22.1
N$132: D49.A R98.1
N$133: D33.A D34.C IC3.5 R23.2 R25.1
N$134: D31.A D32.C D33.C D34.A IC3.6 R24.2 R55.1
N$135: D49.C T23.3
N$136: R100.2 T22.3
N$137: D37.A D38.C IC4.5 R33.2 R35.1
N$138: D35.A D36.C D37.C D38.A IC4.6 R34.2 R56.1
N$139: R97.2 R100.1 T23.1
N$140: R103.1 T24.1
N$141: D41.A D42.C IC6.5 R43.2 R45.1
N$142: D39.A D40.C D41.C D42.A IC6.6 R44.2 R57.1
N$143: D50.A R102.1
N$144: D50.C T25.3
N$145: R104.2 T24.3
N$146: R101.2 R104.1 T25.1
RD0: IC11.8 JP2.4
RD1: IC12.8 JP2.10
RD2: IC9.8 JP2.18
RMT: IC13.8 JP2.6
RTT: IC14.8 JP2.8
S/G(0)_H: JP1.6 JP2.30
SEL_ECHO: JP1.2 JP2.12
T/M_ENAB_H: IC13.2 IC13.4 IC14.2 IC14.4 IC15.12
T/M_ENAB_L: IC15.13 JP2.34 R121.2
TIMING: IC14.12 IC14.13 R7.1 R9.2 R10.2 T1.3
TT(0): J1.AF2 R1.1 R98.2
TT(1): J1.AH2 R2.1 R102.2
UNIT(1)_H: JP1.8 JP2.32
V+: C2.2 C3.2 C4.2 C5.2 C6.2 C13.+ C24.2 C29.2 C32.2 C33.2 C34.2 C35.2 IC1.8 IC2.8 IC3.8 IC4.8 IC6.8 IC8.2 IC8.4 IC9.14 IC11.14 IC12.14 IC13.14 IC14.14 IC15.14 JP1.14 JP1.16 R5.1 R8.1 R10.1 R20.1 R22.1 R30.1 R32.1 R37.1 R40.1 R42.1 R50.1 R52.1 R58.1 R59.1 R60.1 R61.1 R62.1 R105.1 R106.1 R107.1 R108.1 R109.1 R111.1 R114.1 R117.1 R120.1 R121.1 R122.1 R123.1 R124.1 R125.1
V-: C7.1 C8.1 C9.1 C10.1 C11.1 C14.- IC1.4 IC2.4 IC3.4 IC4.4 IC6.4 IC7.3 R17.2 R47.2 R68.2 R112.2 R115.2 R118.2
W_DATA1_P: IC11.3 R61.2 R71.2
W_DATA2_P: IC12.3 R79.2 R105.2
W_DATA3_P: IC9.3 R58.2 R87.2
WD0(0): IC11.5 IC13.5 IC15.6
WD0(1): IC11.1 IC13.1 IC15.5 JP2.28 R123.2
WD1(1): IC12.1 IC15.9 JP2.26 R124.2
WD2(1): IC9.1 IC15.1 JP2.20 R125.2
WD_ENAB: IC9.2 IC9.4 IC11.2 IC11.4 IC12.2 IC12.4 IC15.4
WD_ENAB_TD8E: IC15.3 JP2.22 R120.2
WRT_ECHO: JP1.4 JP2.16
WTT(1): IC14.1 IC15.11 JP2.24 R122.2